# Altium PCB PCB1.PcbDoc
Units mil, origin at the board's own origin, x right, y up, seen from the top; angles counter-clockwise.
Board outline 6000 x 4000 mil, 2 copper layers (Top Layer, Bottom Layer); 25 components, 32 nets, 112 pads, 0 vias.
Unrouted connection lines stored in the file: 56.
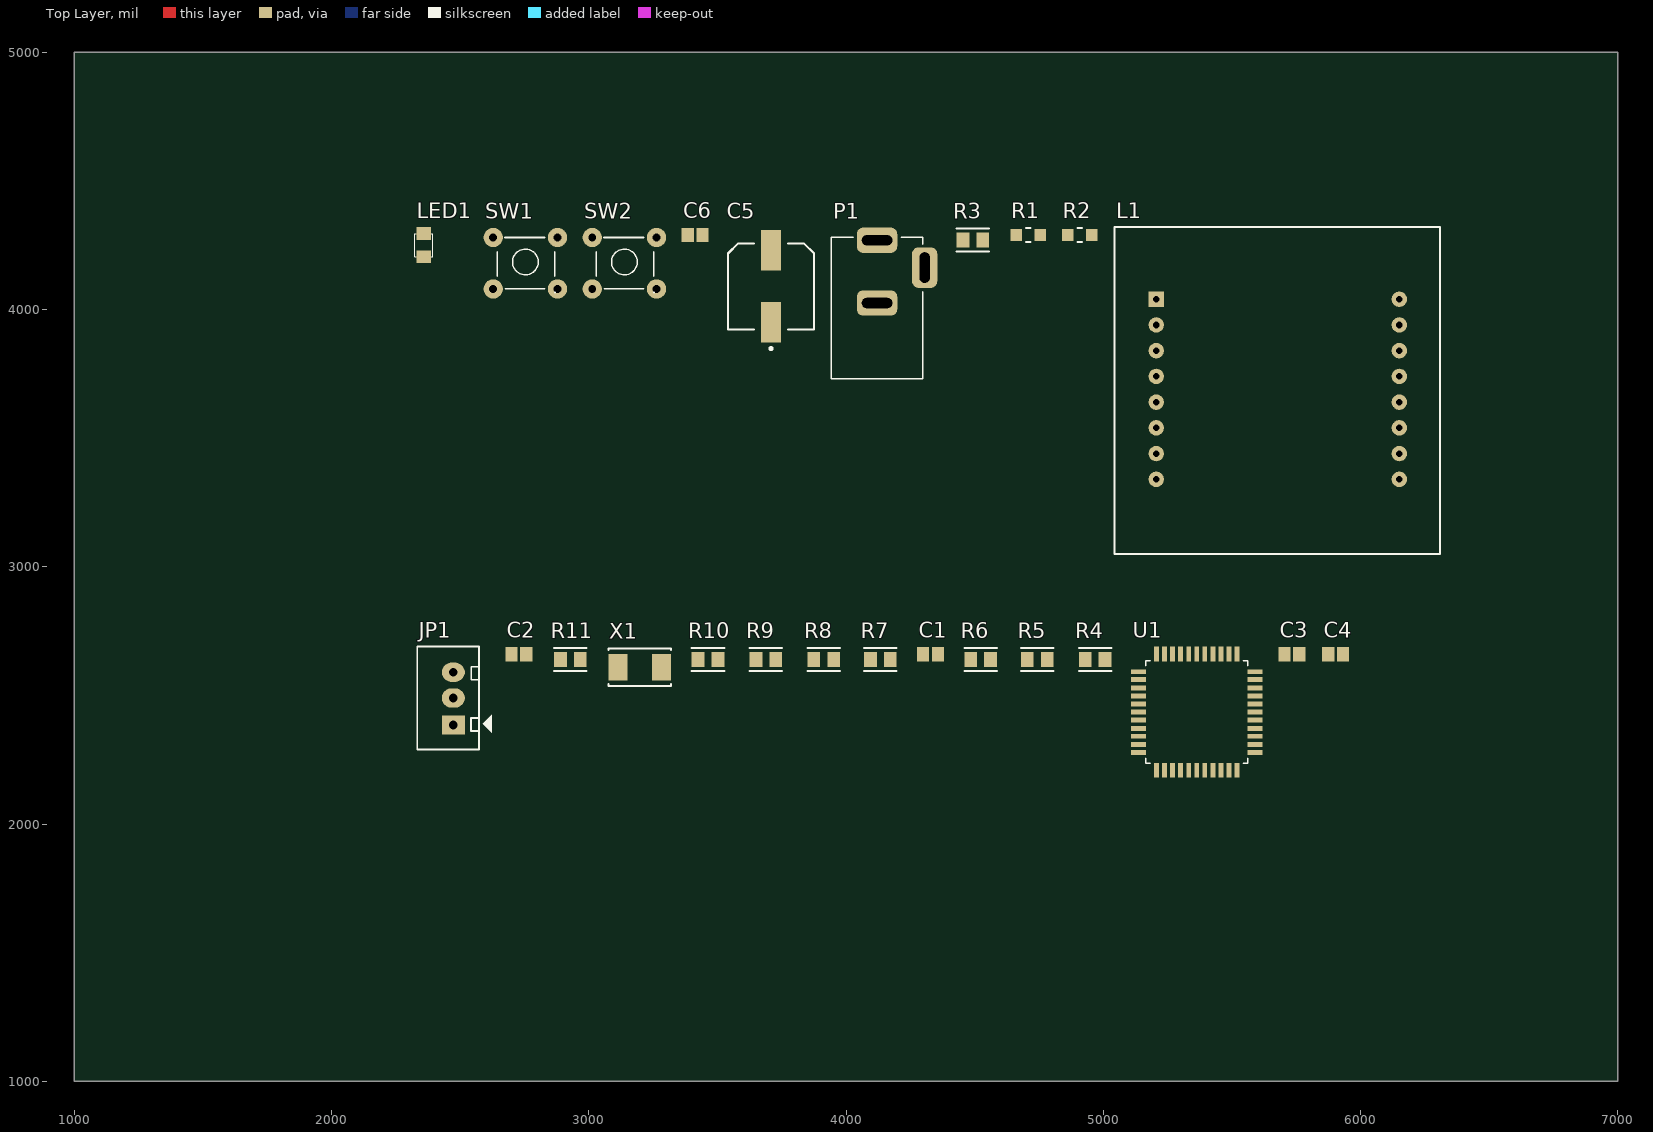
[diagram p0: Top Layer view]
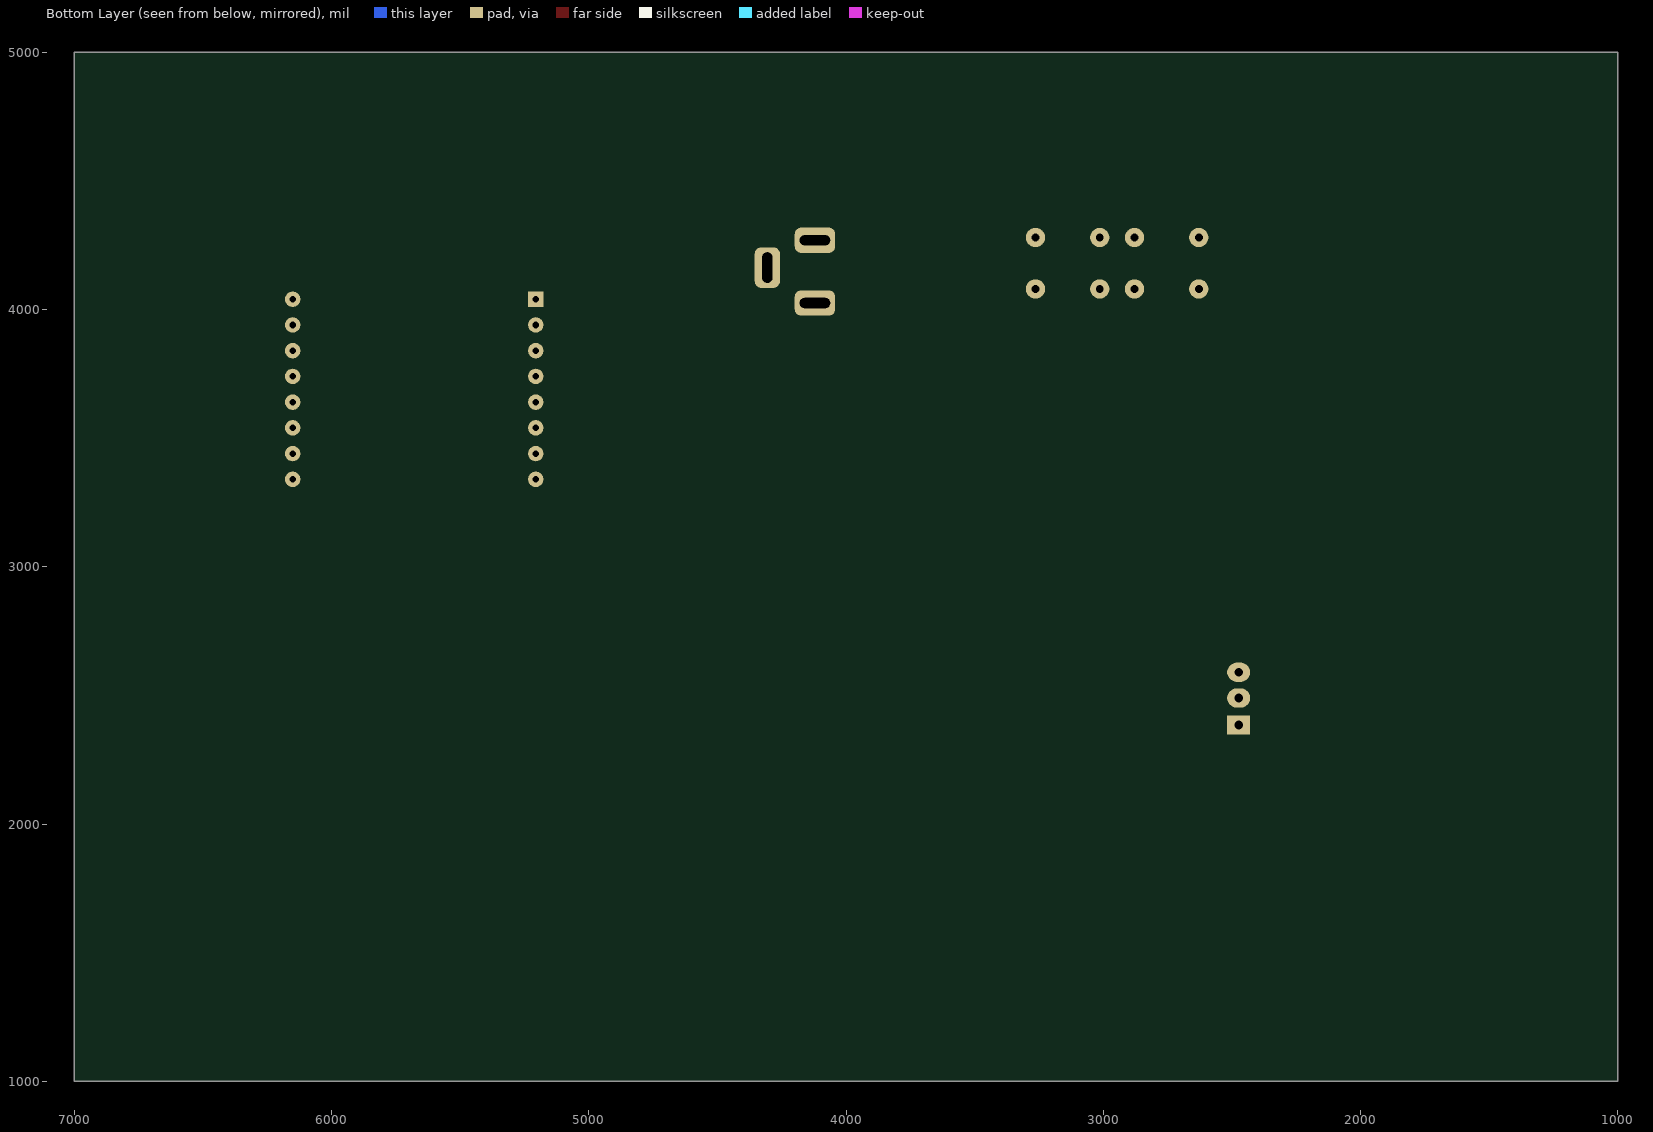
[diagram p1: Bottom Layer view, seen from below]

## Layer stack, top to bottom
Top Solder: solder mask 0.4, Solder Resist, Dk 3.5
Top Layer: signal copper 1.4
Dielectric 1: dielectric 12.6, FR-4, Dk 4.8
Bottom Layer: signal copper 1.4
Bottom Solder: solder mask 0.4, Solder Resist, Dk 3.5

## Board outline
1000,1000 7000,1000 7000,5000 1000,5000

## Design rules (kind name [scope] priority, off if disabled: settings)
Clearance [All] p1: gap=10 ignorepadtopadclearanceinfootprint=FALSE except(0: Arc-Hole Track-Hole SMDPad-Hole THPad-Hole Via-Hole Fill-Hole Poly-Hole Region-Hole Text-Hole)
PolygonConnect [All] p1: connectstyle=Relief reliefconductorwidth=10 reliefentries=4 polygonreliefangle="90 Angle" airgapwidth=10
RoutingVias [All] p1: holewidth=28 width=50 viastyle="Through Hole" minholewidth=28 minwidth=50 maxholewidth=28 maxwidth=50
SolderMaskExpansion [All] p1: expansion=4 istentingtop=FALSE
Width [All] p1: maxlimit=10 minlimit=10 preferedwidth=10
30 further rules are at their usual default settings.

## Components (designator, comment, footprint, x,y, rotation, side; value= is the part's Value field where it differs from the comment)
C1 "22p" CAPC2013X94X50LL25T25 4328.5,2660 r0 top value=100nF
C2 "22p" CAPC2013X94X50LL25T25 2728.5,2660 r0 top value=100nF
C3 "0.1uF" CAPC2013X94X50LL25T25 5733.5,2660 r0 top value=100nF
C4 "0.1uF" CAPC2013X94X50LL25T25 5903.5,2660 r0 top value=100nF
C5 "EEE-FK1H101GP" FP-FKF-MFG 3708.5,4090 r90 top value=100uF
C6 "0.1uF" CAPC2013X94X50LL25T25 3413.5,4290 r0 top value=100nF
JP1 "JP3" CON3 2473.5,2390 r90 top value="Connector 3"
L1 "LED_Maxtrix_8x8" LED_Matrix_8x8 5678.5,3690 r0 top
LED1 "LED SMD" SM-LED-0805-Green 2358.5,4205 r90 top
P1 "DC JACK" DC5.5/2.1 3943.5,3730 r0 top
R1 "10k" FP-CR0805-MFG 4708.5,4290 r0 top value=330R
R2 "10k" FP-CR0805-MFG 4908.5,4290 r0 top value=330R
R3 "470R" FP-CR0805-IPC_A 4493.5,4270 r0 top value=330R
R4 "330R" FP-CR0805-IPC_A 4968.5,2640 r0 top
R5 "330R" FP-CR0805-IPC_A 4743.5,2640 r0 top
R6 "330R" FP-CR0805-IPC_A 4523.5,2640 r0 top
R7 "330R" FP-CR0805-IPC_A 4133.5,2640 r0 top
R8 "330R" FP-CR0805-IPC_A 3913.5,2640 r0 top
R9 "330R" FP-CR0805-IPC_A 3688.5,2640 r0 top
R10 "330R" FP-CR0805-IPC_A 3463.5,2640 r0 top
R11 "330R" FP-CR0805-IPC_A 2928.5,2640 r0 top
SW1 "RESET" SW4 2628.5,4280 r0 top value="SW chip 4 pin"
SW2 "NEXT" SW4 3013.5,4280 r0 top value="SW chip 4 pin"
U1 "PIC16F877A-I/PT" TQFP-44 5363.5,2435 r0 top
X1 "16MHz" FP-ABM7-MFG 3198.5,2610 r0 top

## Footprints (in the part's own frame and the unit in brackets; to place one, negate y for a bottom-side part, rotate by r counter-clockwise, add the part's x,y. Pads: shape width x height; smd on the part's side, far side on the other; paste and mask are expansions set on the pad)
CAPC2013X94X50LL25T25 [mm] "Chip Capacitor, 2-Leads, Body 2.01x1.25mm, IPC High Density"
  rect 1.2x1.4 smd: 1(-0.725,0) 2(0.725,0)
  body extent -1,-0.63 1,0.63, height 0.94
CON3 [mil] "CON 3"
  rect 75x90 hole 34: 1(-5,0)
  oval 75x90 hole 34: 2(100,0) 3(200,0)
  silkscreen extent -100,-150 300,140, body extent -95,-90 295,136, height 276
DC5.5/2.1 [mm] "DC JACK 5.5/2.1mm"
  rrect50% 4x2.5 hole 1 slot 3 at 0 deg paste+1: 1(4.5,13.7) 3(4.5,7.5)
  rrect50% 2.5x4 hole 1 slot 3 at 90 deg paste+1: 2(9.2,11)
  silkscreen extent 0,0 9,14, body extent 0,-1 9.4,14.2, height 11
FP-ABM7-MFG [mm]
  rect 1.9x2.6 smd paste+0 mask+0: 1(-2.15,0) 2(2.15,0)
  silkscreen extent -3.1,-1.85 3.1,1.85, body extent -3.2,-1.95 3.2,1.95, height 0.25
FP-CR0805-IPC_A [mil]
  rect 49.53x57.56 smd paste+0 mask+0: 1(-38.46,0) 2(38.46,0)
  silkscreen extent -63,-45 63,45, body extent -83,-48 83,48, height 10
FP-CR0805-MFG [mm]
  rect 1.15x1.15 smd paste+0 mask+0: 1(-1.175,0) 2(1.175,0)
  silkscreen extent -0.23,-0.67 0.23,0.67, body extent -1.85,-0.77 1.85,0.77, height 0.25
FP-FKF-MFG [mm]
  rect 4x2 smd paste+0 mask+0: 1(3.55,0) 2(-3.55,0)
  silkscreen extent -6.27,-4.25 4.25,4.25, body extent -5.8,-4.5 5.8,4.5, height 0.25
LED_Matrix_8x8 [mil]
  rect 60x60 hole 25.59: 1(-472.44,350)
  round 60 hole 25.59: 2(-472.44,250) 3(-472.44,150) 4(-472.44,50) 5(-472.44,-50) 6(-472.44,-150) 7(-472.44,-250) 8(-472.44,-350) 9(472.44,-350) 10(472.44,-250) 11(472.44,-150) 12(472.44,-50) 13(472.44,50) 14(472.44,150) 15(472.44,250) 16(472.44,350)
  silkscreen extent -635,-640 630,630, body extent -632,-634 627,626, height 551
SM-LED-0805-Green [mil]
  rect 50x55 smd: 1(0,0) 2(90,0)
  silkscreen extent 0,-35 90,35, body extent 5,-25 85,25, height 43
SW4 [mil] "SW button 4pin, 250 x250 mil"
  round 75 hole 31: 1(0,0) 2(250,-200) 3(250,0) 4(0,-200)
  silkscreen extent 15,-215 240,0, body extent -36,-220 276,24, height 276
TQFP-44 [mil]
  rect 58x19 smd: 1(-226,157) 2(-226,126) 3(-226,94) 4(-226,63) 5(-226,31) 6(-226,0) 7(-226,-31) 8(-226,-63) 9(-226,-94) 10(-226,-126) 11(-226,-157) 23(226,-157) 24(226,-126) 25(226,-94) 26(226,-63) 27(226,-31) 28(226,0) 29(226,31) 30(226,63) 31(226,94) 32(226,126) 33(226,157)
  rect 19x58 smd: 12(-157,-226) 13(-126,-226) 14(-94,-226) 15(-63,-226) 16(-31,-226) 17(0,-226) 18(31,-226) 19(63,-226) 20(94,-226) 21(126,-226) 22(157,-226) 34(157,226) 35(126,226) 36(94,226) 37(63,226) 38(31,226) 39(0,226) 40(-31,226) 41(-63,226) 42(-94,226) 43(-126,226) 44(-157,226)
  silkscreen extent -199,-199 199,199, body extent -236,-236 236,236, height 45

## Part data
C1 C2 C3 C4 C6: library part LD051C104KAB2A, "Cap Ceramic 0.1uF 100V X7R 10% SMD 0805 125°C Embossed T/R", Case Code (Imperial)=0805, Case Code (Metric)=2012, Dielectric=X7R, Dielectric Material=Ceramic, Manufacturer="Kyocera AVX", Max Operating Temperature=125°C, Min Operating Temperature=-55°C, Package Quantity=1, Tolerance=10%, Voltage Rating=100V, Case/Package=0805, Category="Ceramic Capacitors", ComponentLink1Description=https://datasheet.ciiva.com/16443/tinterm-16443613.pdf?src-supplier=Future+Electronics, ComponentLink1URL=https://datasheet.ciiva.com/16443/tinterm-16443613.pdf?src-supplier=Future+Electronics, ComponentLink2Description=https://datasheet.ciiva.com/6256/tinterm-6256703.pdf?src-supplier=Digi-Key, ComponentLink2URL=https://datasheet.ciiva.com/6256/tinterm-6256703.pdf?src-supplier=Digi-Key, Depth=1.25mm, Height=1.4mm, Lead Free="Contains Lead", Length=0.079inch, Manufacturer Part Number=LD051C104KAB2A, Mounting Technology="Surface Mount", Packaging="Tape and Reel", Pins=2, Pricing="2000=0,35070 (USD)", RoHS=No, RoHS Compliant=No, Series=LD, Stock=6000, Supplier="Arrow Electronics", Supplier Part Number=LD051C104KAB2A, Termination=SMD/SMT, Thickness=0.037inch, Voltage Rating (DC)=100V, Weight=0.000194oz, Width=0.049inch
C5: "Cap Aluminum 100uF 50V 20% (8 X 10.2mm) SMD 350mA 5000 hr 105°C T/R", Case/Package=SMD/SMT, ESR (Equivalent Series Resistance)=340mR, Leakage Current=10mA, Manufacturer=Panasonic, Max Operating Temperature=105°C, Min Operating Temperature=-55°C, Package Quantity=500, Ratings=AEC-Q200, Ripple Current=350mA, Tolerance=20%, Voltage=50V, Category="Aluminum Electrolytic Capacitors", ComponentLink1Description=https://datasheet.ciiva.com/11783/0900766b80e4e8b0-11783656.pdf?src-supplier=Rs, ComponentLink1URL=https://datasheet.ciiva.com/11783/0900766b80e4e8b0-11783656.pdf?src-supplier=Rs, ComponentLink2Description=https://datasheet.ciiva.com/43458/1676921-43458443.pdf?src-supplier=Farnell, ComponentLink2URL=https://datasheet.ciiva.com/43458/1676921-43458443.pdf?src-supplier=Farnell, ComponentLink3Description=https://datasheet.ciiva.com/46388/1676921-46388584.pdf?src-supplier=Element14, ComponentLink3URL=https://datasheet.ciiva.com/46388/1676921-46388584.pdf?src-supplier=Element14, ComponentLink4Description=https://datasheet.ciiva.com/46376/1676921-46376474.pdf?src-supplier=Element14, ComponentLink4URL=https://datasheet.ciiva.com/46376/1676921-46376474.pdf?src-supplier=Element14, ComponentLink5Description=https://datasheet.ciiva.com/24028/aba0000ce120-24028319.pdf?src-supplier=Mouser, ComponentLink5URL=https://datasheet.ciiva.com/24028/aba0000ce120-24028319.pdf?src-supplier=Mouser, ComponentLink6Description=https://datasheet.ciiva.com/14603/70258115-14603038.pdf?src-supplier=Allied+Electronics, ComponentLink6URL=https://datasheet.ciiva.com/14603/70258115-14603038.pdf?src-supplier=Allied+Electronics, ComponentLink7Description=https://datasheet.ciiva.com/11679/aba0000ce120-11679941.pdf?src-supplier=Avnet, ComponentLink7URL=https://datasheet.ciiva.com/11679/aba0000ce120-11679941.pdf?src-supplier=Avnet, ComponentLink8Description=https://datasheet.ciiva.com/16432/aba0000ce120-16432910.pdf?src-supplier=Future+Electronics, ComponentLink8URL=https://datasheet.ciiva.com/16432/aba0000ce120-16432910.pdf?src-supplier=Future+Electronics, ComponentLink9Description=https://datasheet.ciiva.com/30067/aba0000ce120-30067319.pdf?src-supplier=Onlinecomponents.com, ComponentLink9URL=https://datasheet.ciiva.com/30067/aba0000ce120-30067319.pdf?src-supplier=Onlinecomponents.com, Construction=Cylindrical, Contact Plating=Tin, Diameter=8mm, Height=10.2mm, Height - Seated (Max)=0.402inch, Impedance=340mR, Lead Free="Lead Free", Length=10.2mm, Life (Hours)=5000Hour, Manufacturer Part Number=EEE-FK1H101GP, Mounting Technology="Surface Mount,PCB", Packaging="Tape and Reel", Pins=2, Pricing="500=0,30333, 1000=0,29721, 2000=0,29302, 3000=0,28465, 4000=0,27837, 5000=0,27314, 50000=0,26790 (USD)", Radiation Hardening=No, Reach SVHC Compliant=Yes, Ripple Current (AC)=350mA, RoHS=Yes, RoHS Compliant=Yes, Series=FK, Stock=500, Supplier=Avnet, Supplier Part Number=EEE-FK1H101GP, Termination=SMD/SMT, Voltage Rating=50V, Voltage Rating (DC)=50V, Width=10mm
JP1: library part Con3, "Connector 3"
LED1: library part LED-SMD-0805
P1: library part DC5.5/2.1, "Low Voltage Power Supply Connector", Solder=WAVE
R1 R2 R3 R4 R5 R6 R7 R8 R9 R10 R11: library part CR0805-JW-331ELF, "Res Thick Film 0805 330 Ohm 5% 1/8W ±200ppm/°C Molded SMD SMD Paper Tape on Plastic Reel", Case Code (Imperial)=0805, Case Code (Metric)=2012, Manufacturer=Bourns, Max Operating Temperature=155°C, Max Power Dissipation=125mW, Min Operating Temperature=-55°C, Package Quantity=1, Resistance Tolerance=5%, Resistor Type="Thick Film", Temperature Coefficient=200ppm/°C, Voltage Rating=150V, Case/Package=0805, Category="Chip SMD Resistors", ComponentLink1Description=https://datasheet.ciiva.com/22713/691949-22713270.pdf?src-supplier=Element14, ComponentLink1URL=https://datasheet.ciiva.com/22713/691949-22713270.pdf?src-supplier=Element14, ComponentLink2Description=https://datasheet.ciiva.com/9119/chpreztr-9119959.pdf?src-supplier=Avnet, ComponentLink2URL=https://datasheet.ciiva.com/9119/chpreztr-9119959.pdf?src-supplier=Avnet, ComponentLink3Description=https://datasheet.ciiva.com/46383/1791942-46383770.pdf?src-supplier=Element14, ComponentLink3URL=https://datasheet.ciiva.com/46383/1791942-46383770.pdf?src-supplier=Element14, ComponentLink4Description=https://datasheet.ciiva.com/6547/chpreztr-6547356.pdf?src-supplier=Digi-Key, ComponentLink4URL=https://datasheet.ciiva.com/6547/chpreztr-6547356.pdf?src-supplier=Digi-Key, ComponentLink5Description=https://datasheet.ciiva.com/6547/chpreztr-6547357.pdf?src-supplier=Digi-Key, ComponentLink5URL=https://datasheet.ciiva.com/6547/chpreztr-6547357.pdf?src-supplier=Digi-Key, ComponentLink6Description=https://datasheet.ciiva.com/6547/chpreztr-6547358.pdf?src-supplier=Digi-Key, ComponentLink6URL=https://datasheet.ciiva.com/6547/chpreztr-6547358.pdf?src-supplier=Digi-Key, ComponentLink7Description=https://datasheet.ciiva.com/7986/1902866-7986190.pdf?src-supplier=Element14, ComponentLink7URL=https://datasheet.ciiva.com/7986/1902866-7986190.pdf?src-supplier=Element14, Construction=Rectangular, Contact Plating=Tin, Depth=1.25mm, Features="Moisture Resistant", Height=0.024inch, Length=2mm, Manufacturer Part Number=CR0805-JW-331ELF, Military Standard=Not, Mounting Technology="Surface Mount", Number of Terminations=2, Packaging="Tape and Reel", Pins=2, Power Rating=125mW, Pricing="5000=0,00270, 10000=0,00240, 25000=0,00210, 50000=0,00210 (USD)", Radiation Hardening=No, Reach SVHC Compliant=Yes, RoHS=Yes, RoHS Compliant=Yes, Series=CR0805, Stock=10000, Supplier="Arrow Electronics", Supplier Part Number=CR0805-JW-331ELF, Termination=SMD/SMT, Thickness=508um, Tolerance=5%, Voltage Rating (DC)=150V, Width=1.25mm
SW1 SW2: library part SW4-1, "Switch button 4 pin"
U1: "PIC16F877A Microcontroller IC 8-Bit 20MHz 14KB _8K x 14_ FLASH 44-TQFP _10x10_", Package="TQFP-44 Microchip", Availability=Unavailable, MF=Microchip, MP=PIC16F877A-I/PT, Price=None, SnapEDA_Link=https://www.snapeda.com/parts/PIC16F877A-I/PT/Microchip/view-part/39699/?ref=snap
X1: library part ABM7-16.000MHZ-4-T, "Crystal 16MHz ±30ppm (Tol) ±50ppm (Stability) 18pF FUND 50Ohm 2-Pin Mini-CSMD T/R", Case/Package=SMD/SMT, ESR (Equivalent Series Resistance)=50R, Frequency Stability=50ppm, Frequency Tolerance=30ppm, Load Capacitance=18pF, Manufacturer=Abracon, Max Operating Temperature=60°C, Min Operating Temperature=-10°C, Supplier Part Number=815-ABM716.MHZ4T, Category=Crystals, ComponentLink1Description=https://datasheet.ciiva.com/16411/abm7-16411039.pdf?src-supplier=Future+Electronics, ComponentLink1URL=https://datasheet.ciiva.com/16411/abm7-16411039.pdf?src-supplier=Future+Electronics, Frequency=16MHz, Height=0.055inch, Lead Free="Lead Free", Length=0.236inch, Manufacturer Part Number=ABM7-16.000MHZ-4-T, Mounting Technology="Surface Mount", Packaging="Tape and Reel", Pricing="1=0,87000, 10=0,87000, 50=0,87000, 100=0,87000, 1000=0,53000, 10000=0,53000 (USD)", Reach SVHC Compliant=Yes, RoHS=Yes, RoHS Compliant=Yes, Stock=701, Supplier=Mouser, Width=0.138inch

## Nets (pads, with @x,y where several pads share a name; then routed paths per layer and width w, separated by ;. In a path a pad name is that pad's centre, name@x,y a point inside that pad or via, vN(x,y) a via of type N, cw(c..) or ccw(c..) an arc to the next point about the centre after c; other vN are vias at no path point)
+5: C5.1 C6.2 JP1.3 P1.1 R1.1 R2.1 R3.1 U1.7 U1.28
C1: L1.13 U1.38
C2: L1.3 U1.39
C3: L1.4 U1.40
C4: L1.10 U1.41
C5: L1.6 U1.2
C6: L1.11 U1.3
C7: L1.15 U1.4
C8: L1.16 U1.5
CLKI: C1.2 U1.30 X1.1
CLKO: C2.2 U1.31 X1.2
GND: C1.1 C2.1 C3.1 C4.1 C5.2 C6.1 JP1.1 LED1.2 P1.2 P1.3 SW1.4 SW2.4 U1.6 U1.29
NetLED1_1: LED1.1 R3.2
NetR4_1: R4.1 U1.32
NetR5_1: R5.1 U1.35
NetR6_1: R6.1 U1.36
NetR7_1: R7.1 U1.37
NetR8_1: R8.1 U1.42
NetR9_1: R9.1 U1.43
NetR10_1: R10.1 U1.44
NetR11_1: R11.1 U1.1
NEXT: C4.2 R2.2 SW2.3
R1: L1.9 R4.2
R2: L1.14 R5.2
R3: L1.8 R6.2
R4: L1.12 R7.2
R5: L1.1 R8.2
R6: L1.7 R9.2
R7: L1.2 R10.2
R8: L1.5 R11.2
RST: C3.2 R1.2 SW1.3 U1.18
Sensor1: JP1.2 U1.19
pads on no net: SW1.1 SW1.2 SW2.1 SW2.2 U1.8 U1.9 U1.10 U1.11 U1.12 U1.13 U1.14 U1.15 U1.16 U1.17 U1.20 U1.21 U1.22 U1.23 U1.24 U1.25 U1.26 U1.27 U1.33 U1.34